# EAGLE board CAP-M-ZN (EAGLE 3.55)

No outline drawn. Coordinates in mm, seen from the top.
Copper layers used: 

## Footprints (pad centres in the part's own frame; a part is rotated, then mirrored left to right if it is on the bottom)
30 = drill 1.27 pad 2.184 octagon:  -16.51,0;  16.51,0
*30 = drill 1.27 pad 2.184 octagon:  -16.51,0;  16.51,0
*40 = drill 1.27 pad 2.54 octagon:  -21.59,0;  21.59,0
*38 = drill 1.27 pad 2.54 octagon:  -20.32,0;  20.32,0

## Placement (x,y rotation side)
7*30  [30]  34.29,240.03 0 top
8*30  [30]  74.93,240.03 0 top
10*30  [*30]  115.57,240.03 0 top
11*30  [*30]  154.94,240.03 0 top
15*30  [*30]  34.29,219.71 0 top
16*30  [*30]  74.93,219.71 0 top
17*30  [*30]  115.57,219.71 0 top
18*40  [*40]  91.44,194.31 0 top
19*30  [*30]  154.94,219.71 0 top
20*40  [*40]  149.86,194.31 0 top
21*30  [*30]  34.29,194.31 0 top
22*40  [*40]  39.37,160.02 0 top
23*38  [*38]  92.71,160.02 0 top
33*40  [*40]  149.86,160.02 0 top
TQFP1  [-35SC]  0,0 0 top

## Library data of the parts
7*30 8*30 10*30 11*30 15*30 16*30 17*30 18*40 19*30 20*40 21*30 22*40 23*38 33*40 = cap-m-zn
TQFP1 = BLATT